# EAGLE board board_1 (EAGLE 5.11)
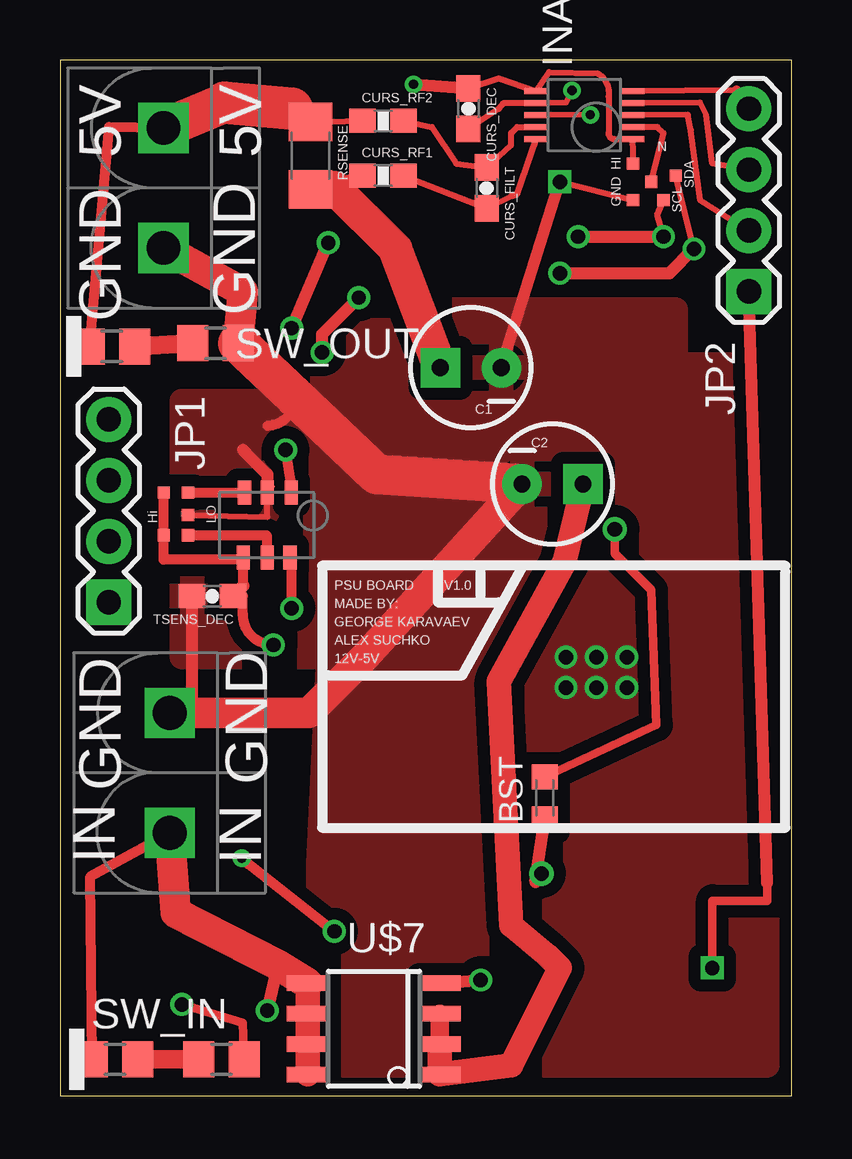
[diagram p0: board, top side]
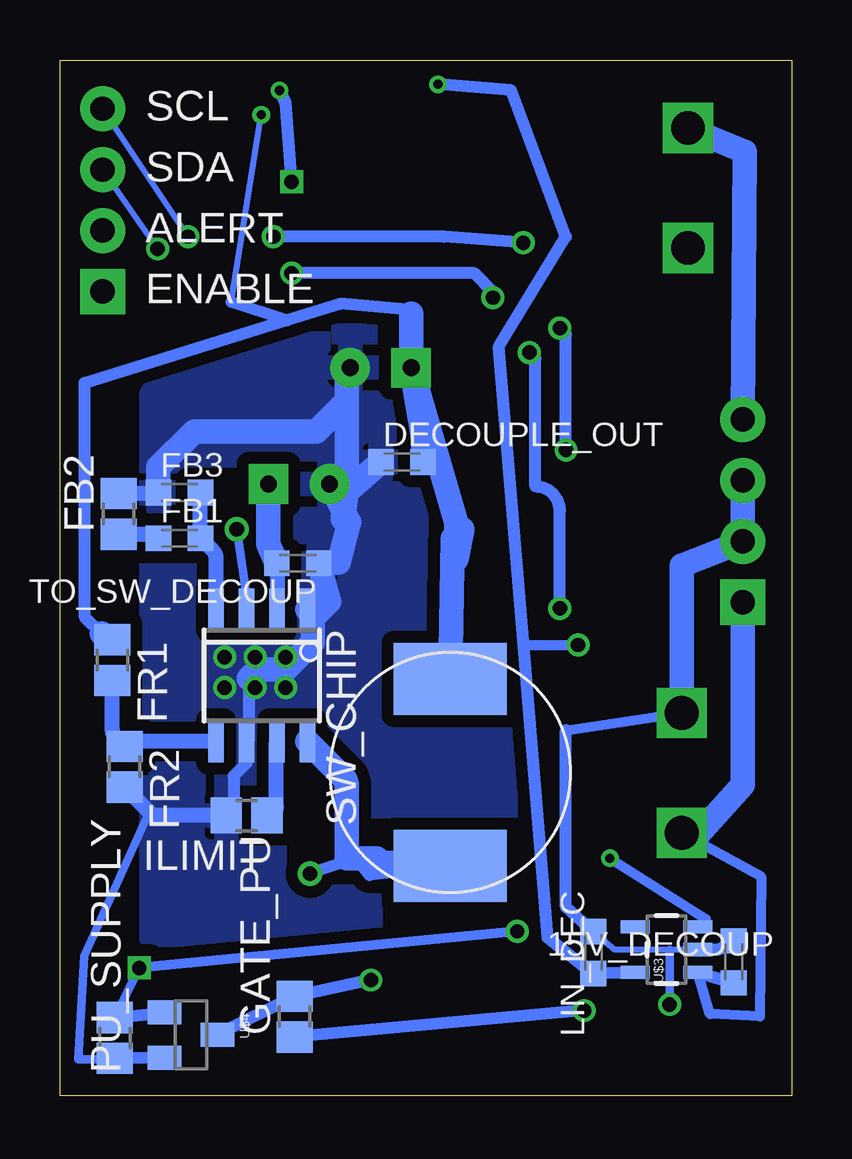
[diagram p1: board, bottom side, seen from below]

Size 30.48 x 43.18 mm. Coordinates in mm from the lower left corner, seen from the top.
Outline: 0,0 30.48,0 30.48,43.18 0,43.18 0,0
Copper layers (1*16): Top 0.0356mm / dielectric 1.5011mm / Bottom 0.0356mm
Design rules "LaenPCBOrder": minimum track width 6mil, minimum drill 13mil, track to track 6mil, track to pad 6mil, pad to pad 6mil, via to via 6mil, smd to smd 6mil, copper to edge 15mil, drill to drill 6mil, minimum pad ring 7mil, minimum via ring 7mil, stop-mask expansion 4mil, vias tented up to drill 0mil, thermal gap 10mil

## Footprints (pad centres in the part's own frame; a part is rotated, then mirrored left to right if it is on the bottom)
C0603K = smd 1.05 x 1.08: 1 -0.875,0; 2 0.875,0
CPOL-RADIAL-10UF-25V = drill 0.7 pad 1.651 square: 1 1.27,0 | drill 0.7 pad 1.651 round: 2 -1.27,0
PSOP-10 = smd 0.25 x 1: P$1 -0.5,-1.5; P$2 0,-1.5; P$3 0.5,-1.5; P$4 1,-1.5; P$5 1.5,-1.5; P$6 1.5,2.5; P$7 1,2.5; P$8 0.5,2.5; P$9 0,2.5; P$10 -0.5,2.5
0603-CAP = smd 1.1 x 1: 1 -0.85,0; 2 0.85,0
0603-RES = smd 1.1 x 1: 1 -0.85,0; 2 0.85,0
R0805 = smd 1.3 x 1.5: 1 -0.85,0; 2 0.85,0
1X04 = drill 1.016 pad 1.88 square: 1 0,0 | drill 1.016 pad 1.88 round: 2 2.54,0; 3 5.08,0; 4 7.62,0
R0805' = smd 1.3 x 1.5: 1 -0.95,0; 2 0.95,0
1206 = smd 1.6 x 1.8: 1 -1.4,0; 2 1.4,0
SOIC8 = smd 0.65 x 1.75: 1 -1.905,-2.75; 2 -0.635,-2.75; 3 0.635,-2.75; 4 1.905,-2.75; 5 1.905,2.75; 6 0.635,2.75; 7 -0.635,2.75; 8 -1.905,2.75
D0805 = smd 1.3 x 1.5: 1 -0.95,0; 2 0.95,0
PAD.02X.02 = smd 0.508 x 0.508: P$1 0,0
TERM_BLOCK_2 = drill 1.4 square: P$1 -2.5,0; P$2 2.5,0
NR10050 = smd 3 x 4.7: P$1 -3.9,0; P$2 3.9,0
SOT23-5 = smd 0.55 x 1.2: 1 -0.95,-1.3; 2 0,-1.3; 3 0.95,-1.3; 4 0.95,1.3; 5 -0.95,1.3
SOT23 = smd 1 x 1.4: 1 -0.95,-1.1; 2 0.95,-1.1; 3 0,1.1
PSOP-6 = smd 0.55 x 1: P$1 -1,0; P$2 0,0; P$3 0.95,0; P$4 1,2.7; P$5 0,2.7; P$6 -0.95,2.7

## Placement (x,y rotation side)
15V_DECOUP  0.1 uF  [C0603K]  2.41,5.59 270 bottom
BST  [C0603K]  20.19,12.42 90 top
C1  [CPOL-RADIAL-10UF-25V]  17.12,30.35 180 top
C2  [CPOL-RADIAL-10UF-25V]  20.52,25.5 0 top
CUR_SENS  INA226  [PSOP-10]  22.35,40.39 90 top
CURS_DEC  0.1uF  [0603-CAP]  17.02,41.15 270 top
CURS_FILT  0.1-1 uF  [0603-CAP]  17.78,37.85 270 top
CURS_RF1  1 ohm  [0603-RES]  13.46,38.35 0 top
CURS_RF2  1 ohm  [0603-RES]  13.46,40.64 0 top
DECOUPLE_OUT  [C0603K]  16.23,26.42 0 bottom
FB1  [C0603K]  25.5,23.24 0 bottom
FB2  2k  [R0805]  28.04,24.26 90 bottom
FB3  [C0603K]  25.5,25.15 0 bottom
FR1  19.62k  [R0805]  28.3,18.16 270 bottom
FR2  3.74k  [R0805]  27.79,13.72 270 bottom
GATE_PU  5k  [R0805]  20.7,3.3 90 bottom
ILIMIT  big  [R0805]  22.71,11.68 180 bottom
JP1  [1X04]  2.03,20.57 90 top
JP2  [1X04]  28.7,33.53 90 top
LIN_DEC  [C0603K]  8.26,5.97 270 bottom
PU_SUPPLY  5k  [R0805]  28.19,2.41 270 bottom
R1  [R0805']  6.73,1.52 180 top
R2  [R0805']  6.48,31.37 180 top
RSENSE  [1206]  10.44,39.19 270 top
SW_CHIP  [SOIC8]  22.07,17.53 180 bottom
SW_IN  LED  [D0805]  2.29,1.52 180 top
SW_OUT  LED  [D0805]  2.16,31.24 180 top
TO_SW_DECOUP  [C0603K]  20.57,22.2 180 bottom
TP1  TEST-POINT2  [PAD.02X.02]  24.64,38.1 0 top
TP2  TEST-POINT2  [PAD.02X.02]  23.88,37.34 0 top
TP3  TEST-POINT2  [PAD.02X.02]  23.88,38.86 0 top
TP4  TEST-POINT2  [PAD.02X.02]  25.15,37.34 0 top
TP5  TEST-POINT2  [PAD.02X.02]  25.65,38.35 0 top
TP6  TEST-POINT2  [PAD.02X.02]  5.33,25.15 0 top
TP7  TEST-POINT2  [PAD.02X.02]  5.33,23.37 0 top
TP8  TEST-POINT2  [PAD.02X.02]  5.33,24.21 0 top
TP9  TEST-POINT2  [PAD.02X.02]  4.32,25.15 0 top
TP10  TEST-POINT2  [PAD.02X.02]  4.32,23.37 0 top
TSENS_DEC  0.1uF  [0603-CAP]  6.35,20.83 180 top
U$1  PLUG_TERM_2  [TERM_BLOCK_2]  4.57,13.46 90 top
U$2  NR10050  [NR10050]  14.22,13.49 90 bottom
U$3  MIC5235  [SOT23-5]  5.21,6.1 90 bottom
U$4  IRFML8244  [SOT23]  25.02,2.54 270 bottom
U$5  PLUG_TERM_2  [TERM_BLOCK_2]  4.32,37.85 90 top
U$6  TMP100  [PSOP-6]  8.64,25.15 180 top
U$7  IRF9317  [SOIC8]  13.08,2.79 90 top

## Library data of the parts
15V_DECOUP BST DECOUPLE_OUT FB1-FB3 FR1 FR2 GATE_PU ILIMIT LIN_DEC PU_SUPPLY TO_SW_DECOUP = resistor
C1 C2 CURS_DEC CURS_FILT CURS_RF1 CURS_RF2 JP1 JP2 RSENSE TP1-TP10 TSENS_DEC = SparkFun
CUR_SENS SW_CHIP U$1-U$7 = chlk_bot
R1 R2 = rcl
SW_IN SW_OUT = ipad_thingy

## Nets
+5V: C1.1 CUR_SENS.P$8 CURS_RF1.1 DECOUPLE_OUT.2 FR1.1 RSENSE.2 U$2.P$2
+12V: 15V_DECOUP.2 GATE_PU.1 JP1.1 SW_IN.2 U$1.P$1 U$3.1 U$7.5 U$7.6 U$7.7 U$7.8
ADD0: CUR_SENS.P$2 TP1.P$1
ALERT: CUR_SENS.P$3 JP2.2
GATE_INPUT: JP2.1 PU_SUPPLY.1 U$3.3 U$4.1
GND: 15V_DECOUP.1 C1.2 C2.2 CUR_SENS.P$7 CURS_DEC.2 DECOUPLE_OUT.1 FB2.2 FB3.1 FR2.2 ILIMIT.2 JP1.2 JP1.3 LIN_DEC.1 PU_SUPPLY.2 R1.1 R2.1 SW_CHIP.1 SW_CHIP.6 TO_SW_DECOUP.1 TP2.P$1 TP8.P$1 TSENS_DEC.2 U$1.P$2 U$3.2 U$4.2 U$5.P$1 U$6.P$2
N$1: FR1.2 FR2.1 SW_CHIP.5
N$3: CUR_SENS.P$10 CURS_FILT.2 CURS_RF1.2
N$4: CUR_SENS.P$9 CURS_FILT.1 CURS_RF2.2
N$5: C2.1 SW_CHIP.2 TO_SW_DECOUP.2 U$7.1 U$7.2 U$7.3
N$14: BST.1 SW_CHIP.8 U$2.P$1
N$15: BST.2 SW_CHIP.3
N$16: ILIMIT.1 SW_CHIP.7
N$17: FB1.1 FB2.1
N$18: FB1.2 FB3.2 SW_CHIP.4
N$19: R1.2 SW_IN.1
N$21: R2.2 SW_OUT.1
N$27: GATE_PU.2 U$4.3 U$7.4
OUTPUT_5V: CURS_RF2.1 JP1.4 RSENSE.1 SW_OUT.2 U$5.P$2
SCL: CUR_SENS.P$5 JP2.4 TP4.P$1 U$6.P$1
SDA: CUR_SENS.P$4 JP2.3 TP5.P$1 U$6.P$6
T_AD0: TP7.P$1 U$6.P$5
T_AD1: TP6.P$1 U$6.P$3
VCC: CUR_SENS.P$1 CUR_SENS.P$6 CURS_DEC.1 LIN_DEC.2 TP3.P$1 TP9.P$1 TP10.P$1 TSENS_DEC.1 U$3.5 U$6.P$4

## Tracks (layer width: path | path; a pad name or v marks a point on that pad's centre or on a via)
+5V  (via drill 0.38)
  Top 0.254: CURS_RF1.1 RSENSE.2 | v22.1,40.89 CUR_SENS.P$8
  Top 0.406: 10.67,37.85 CURS_RF1.1
  Top 1.422: C1.1 13.97,35.31 11.43,37.85 10.67,37.85
  Bottom 0.254: 23.34,33.1 v22.1,40.89
  Bottom 0.508: 15.85,32.61 16,32.77 18.8,33.02 21.03,32.33 | 28.74,19.27 29.46,19.99 29.46,29.72 21.03,32.33 | 21.03,32.33 23.34,33.1
  Bottom 1.016: U$2.P$2 14.11,23.24 13.73,23.62 13.97,22.35 13.97,23.9 C1.1 | C1.1 15.34,27.45 DECOUPLE_OUT.2 | 28.74,19.27 FR1.1 | C1.1 15.85,32.61
+12V  (via drill 0.6)
  Top 0.406: SW_IN.2 1.27,9.14 U$1.P$1
  Top 0.508: 9.08,5.46 v8.64,3.56
  Top 1.016: U$7.8 U$7.7 U$7.6 U$7.5
  Top 1.27: U$7.5 9.08,5.46 4.83,7.62 U$1.P$1
  Bottom 0.406: U$3.1 3.4,3.42 1.32,3.31 1.27,9.14 4.08,10.69 U$1.P$1
  Bottom 0.508: U$3.1 15V_DECOUP.2 | v8.64,3.56 GATE_PU.1
  Bottom 1.016: JP1.1 2.03,12.95 4.08,10.69
ADD0
  Top 0.254: CUR_SENS.P$2 24.89,40.39 25.15,40.13 TP1.P$1
ALERT
  Top 0.254: JP2.2 26.67,37.34 26.29,40.26 26.16,40.89 CUR_SENS.P$3
GATE_INPUT  (via drill 0.38, 0.6)
  Top 0.356: v27.18,5.33 27.18,8.13 29.46,8.13 29.46,8.89
  Top 0.406: 7.87,9.65 v7.57,9.91 v11.43,6.86
  Top 0.508: 29.46,8.89 JP2.1
  Bottom 0.356: v27.18,5.33 PU_SUPPLY.1 | U$3.3 3.56,7.37
  Bottom 0.406: 3.56,7.37 v7.57,9.91 | v11.43,6.86 v27.18,5.33
  Bottom 0.508: PU_SUPPLY.1 U$4.1
GND  (via drill 0.38, 0.6)
  Top 0.152: U$6.P$2 8.89,25.4 7.62,26.67 7.75,26.8
  Top 0.254: CURS_DEC.2 18.29,41.15 18.47,41.38 CUR_SENS.P$7 21.08,41.4 v21.34,41.91 | v20.83,38.1 TP2.P$1 | U$6.P$2 8.64,24.13 TP8.P$1
  Top 0.356: R1.1 7.62,3.05 v5.08,3.81
  Top 0.406: 8.64,27.94 arc90 9.8,29.1 9.8,29.13
  Top 0.508: C1.2 v20.83,38.1 | 8.64,25.4 8.64,25.91 7.75,26.8 7.62,26.92 | TSENS_DEC.2 5.5,15.96 U$1.P$2
  Top 1.27: R2.1 7.62,33.53 U$5.P$1 | U$1.P$2 10.37,15.96 12.7,18.29 C2.2
  Top 1.676: R2.1 9.8,29.13 13.21,25.91 C2.2
  Bottom 0.254: U$3.2 5.08,6.1 7.37,6.1 LIN_DEC.1
  Bottom 0.356: U$4.2 27.94,1.52 29.72,1.52 29.46,5.84 26.77,11.84 | 5.08,6.1 v5.08,3.81
  Bottom 0.406: 9.4,15.24 U$1.P$2
  Bottom 0.508: 22.61,17.4 22.61,14.88 SW_CHIP.6 22.71,13.87 23.24,13.34 23.24,12 ILIMIT.2 | U$3.2 3.05,6.1 15V_DECOUP.1 | U$4.2 PU_SUPPLY.2 | LIN_DEC.1 9.4,7.87 9.4,15.24 | v20.83,38.1 21.08,41.4 v21.34,41.91
  Bottom 0.635: FB2.2 26.42,25.11 arc-90 FB3.1 | FR2.2 26.77,11.84 26.72,11.8 arc-45 26.45,11.68 ILIMIT.2
  Bottom 1.016: C1.2 18.43,30.31 arc-45 18.54,30.04 18.54,28.96 | 18.54,25.15 18.54,28.96 | 18.54,25.15 18.7,24.04 arc-45 18.43,23.93 | C2.2 18.43,23.93 | DECOUPLE_OUT.1 18.38,25.31 18.54,25.15 | 18.43,23.93 18.87,22.23 TO_SW_DECOUP.1 19.27,20.61 19.81,20.07 19.96,20.07 | 19.96,20.07 SW_CHIP.1 | FB3.1 26.38,26.2 24.89,27.69 19.81,27.69 18.54,28.96 | 19.96,20.07 19.96,18.9 21.08,17.78 22.23,17.78 22.61,17.4 | U$1.P$2 4.57,22.1 JP1.2 JP1.3
  other vias: 21.08,17.02 21.08,18.29 22.35,18.29 22.35,17.02 23.62,17.02 23.62,18.29
  pour Top (isolate 0.508): 25.65,32.77 25.65,30.48 29.46,30.48 29.46,1.27 11.43,1.27 11.43,2.29 10.41,2.29 11.18,18.29 5.08,18.29 5.08,28.96 10.92,28.96 10.92,32.77
  pour Bottom (isolate 0.508): 11.43,32.26 24.89,31.75 26.67,29.21 26.67,6.6 12.19,6.35 11.18,12.45 11.18,28.45
N$1
  Bottom 0.635: FR1.2 28.3,15.23 arc-45 28.18,14.96 FR2.1 27.69,14.66 arc45 27.42,14.78 SW_CHIP.5
N$3
  Top 0.254: CURS_RF1.2 CURS_FILT.2 18.8,37.5 19.05,37.59 CUR_SENS.P$10
N$4
  Top 0.254: CURS_RF2.2 15.49,40.39 16.51,38.86 CURS_FILT.1 18.8,39.62 18.8,40.13 19.05,40.39 CUR_SENS.P$9
N$5
  Top 0.762: U$7.2 U$7.3
  Top 1.016: U$7.2 U$7.1 18.8,1.27 20.83,5.33 20.32,5.84 18.8,7.11 18.29,17.27 21.02,22.23 C2.1
  Bottom 0.635: SW_CHIP.2 21.44,21.8 arc90 TO_SW_DECOUP.2
  Bottom 1.016: C2.1 21.79,23 TO_SW_DECOUP.2
N$14  (via drill 0.61 pad 1.02)
  Top 0.508: BST.1 19.81,8.9 v20.07,9.27
  Bottom 0.508: v20.07,9.27 18.54,9.78 18.03,9.78 17.59,9.21 U$2.P$1
  Bottom 1.016: SW_CHIP.8 18.65,13.26 arc45 18.54,12.99 18.54,9.91 17.27,9.91 arc-45 17.34,9.75 U$2.P$1
N$15  (via drill 0.61 pad 1.02)
  Top 0.356: v23.11,23.62 23.11,22.61 24.64,21.08 24.85,15.46 BST.2
  Bottom 0.356: v23.11,23.62 22.73,21.08 22.71,20.57 SW_CHIP.3
N$16
  Bottom 0.635: SW_CHIP.7 arc-45 21.46,14.71 21.46,12.08 arc90 ILIMIT.1
N$17
  Bottom 0.635: FB2.1 26.54,23.41 arc90 FB1.1
N$18
  Bottom 0.635: SW_CHIP.4 23.98,22.43 arc-45 24.09,22.7 FB1.2 FB3.2
N$19
  Top 0.762: SW_IN.1 R1.2
N$21
  Top 0.762: SW_OUT.1 R2.2
N$27  (via drill 0.6)
  Top 0.508: U$7.4 v17.53,4.83
  Bottom 0.508: U$4.3 GATE_PU.2 v17.53,4.83
OUTPUT_5V
  Top 0.254: RSENSE.1 CURS_RF2.1
  Top 0.406: SW_OUT.2 2.03,40.39 U$5.P$2
  Top 1.016: 9.65,41.15 RSENSE.1
  Top 1.676: U$5.P$2 6.86,41.4
  Top 1.778: 6.86,41.4 9.65,41.15
  Bottom 1.016: JP1.4 1.94,39.35 U$5.P$2
SCL  (via drill 0.6)
  Top 0.254: 28.19,41.91 CUR_SENS.P$5 | TP4.P$1 24.89,36.7 v25.15,35.81
  Top 0.406: JP2.4 28.19,41.91 | U$6.P$1 arc-90 9.65,25.38 v9.4,26.92
  Top 0.508: v21.59,35.81 v25.15,35.81 | v9.65,32 v11.18,35.56
  Bottom 0.254: v25.15,35.81 JP2.4
  Bottom 0.508: v21.59,35.81 14.48,35.81 v11.18,35.56 | v9.65,32 9.4,31.75 v9.4,26.92
SDA  (via drill 0.6)
  Top 0.254: JP2.3 27.18,38.86 26.92,40.89 26.67,41.4 CUR_SENS.P$4 | v26.42,35.31 TP5.P$1
  Top 0.406: U$6.P$6 arc-90 9.65,22.38 v9.65,20.32
  Top 0.508: v26.42,35.31 25.4,34.29 v20.83,34.29 | v12.45,33.27 10.92,31.75 v10.92,30.99
  Bottom 0.254: v26.42,35.31 JP2.3
  Bottom 0.508: v20.83,34.29 13.21,34.29 12.45,33.53 v12.45,33.27 | v10.92,30.99 10.67,30.73 10.67,25.4 arc90 9.65,24.38 v9.65,20.32 9.65,20.07
T_AD0
  Top 0.406: U$6.P$5 8.61,23.37 TP7.P$1
T_AD1
  Top 0.406: TP6.P$1 U$6.P$3
VCC  (via drill 0.38, 0.6)
  Top 0.254: CURS_DEC.1 18.29,42.42 CUR_SENS.P$6 20.38,42.67 22.4,42.62 arc-67 22.86,41.66 22.86,40.13 arc90 23.11,39.88 23.37,39.88 CUR_SENS.P$1 TP3.P$1
  Top 0.406: v8.89,18.8 arc-90 7.62,20.07 7.62,20.83 TSENS_DEC.1 | 7.64,21.26 U$6.P$4 arc90 7.62,22.43 7.62,22.35 4.32,22.35 TP10.P$1 TP9.P$1
  Top 0.508: v14.73,42.16 CURS_DEC.1 | TSENS_DEC.1 7.64,21.26
  Bottom 0.406: v8.89,18.8 10.97,18.8 arc90 11.18,19.01
  Bottom 0.508: U$3.5 LIN_DEC.2 10.16,6.6 11.18,19.01 12.19,31.24 9.4,35.81 11.68,41.91 v14.73,42.16

## Text on the board
tNames: 5V | 5V | HI | N | GND | GND | SDA | GND | SCL | Hi | LO | PSU BOARD | V1.0 | GEORGE KARAVAEV | MADE BY: | GND | ALEX SUCHKO | GND | 12V-5V | IN | IN
bNames: SCL | SDA | ALERT | ENABLE